# Altium PCB LTO 16S BMS.PcbDoc (part 2 of 2)
Units mm, origin at the board's own origin, x right, y up, seen from the top; angles counter-clockwise.
Board outline 100 x 100 mm, 4 copper layers (L1 - Primary, L2 - GND, L3 - GND, L4 - Secondary), stack 1.685 mm thick; 254 components, 145 nets, 666 pads, 230 vias.
Unrouted connection lines stored in the file: 137.
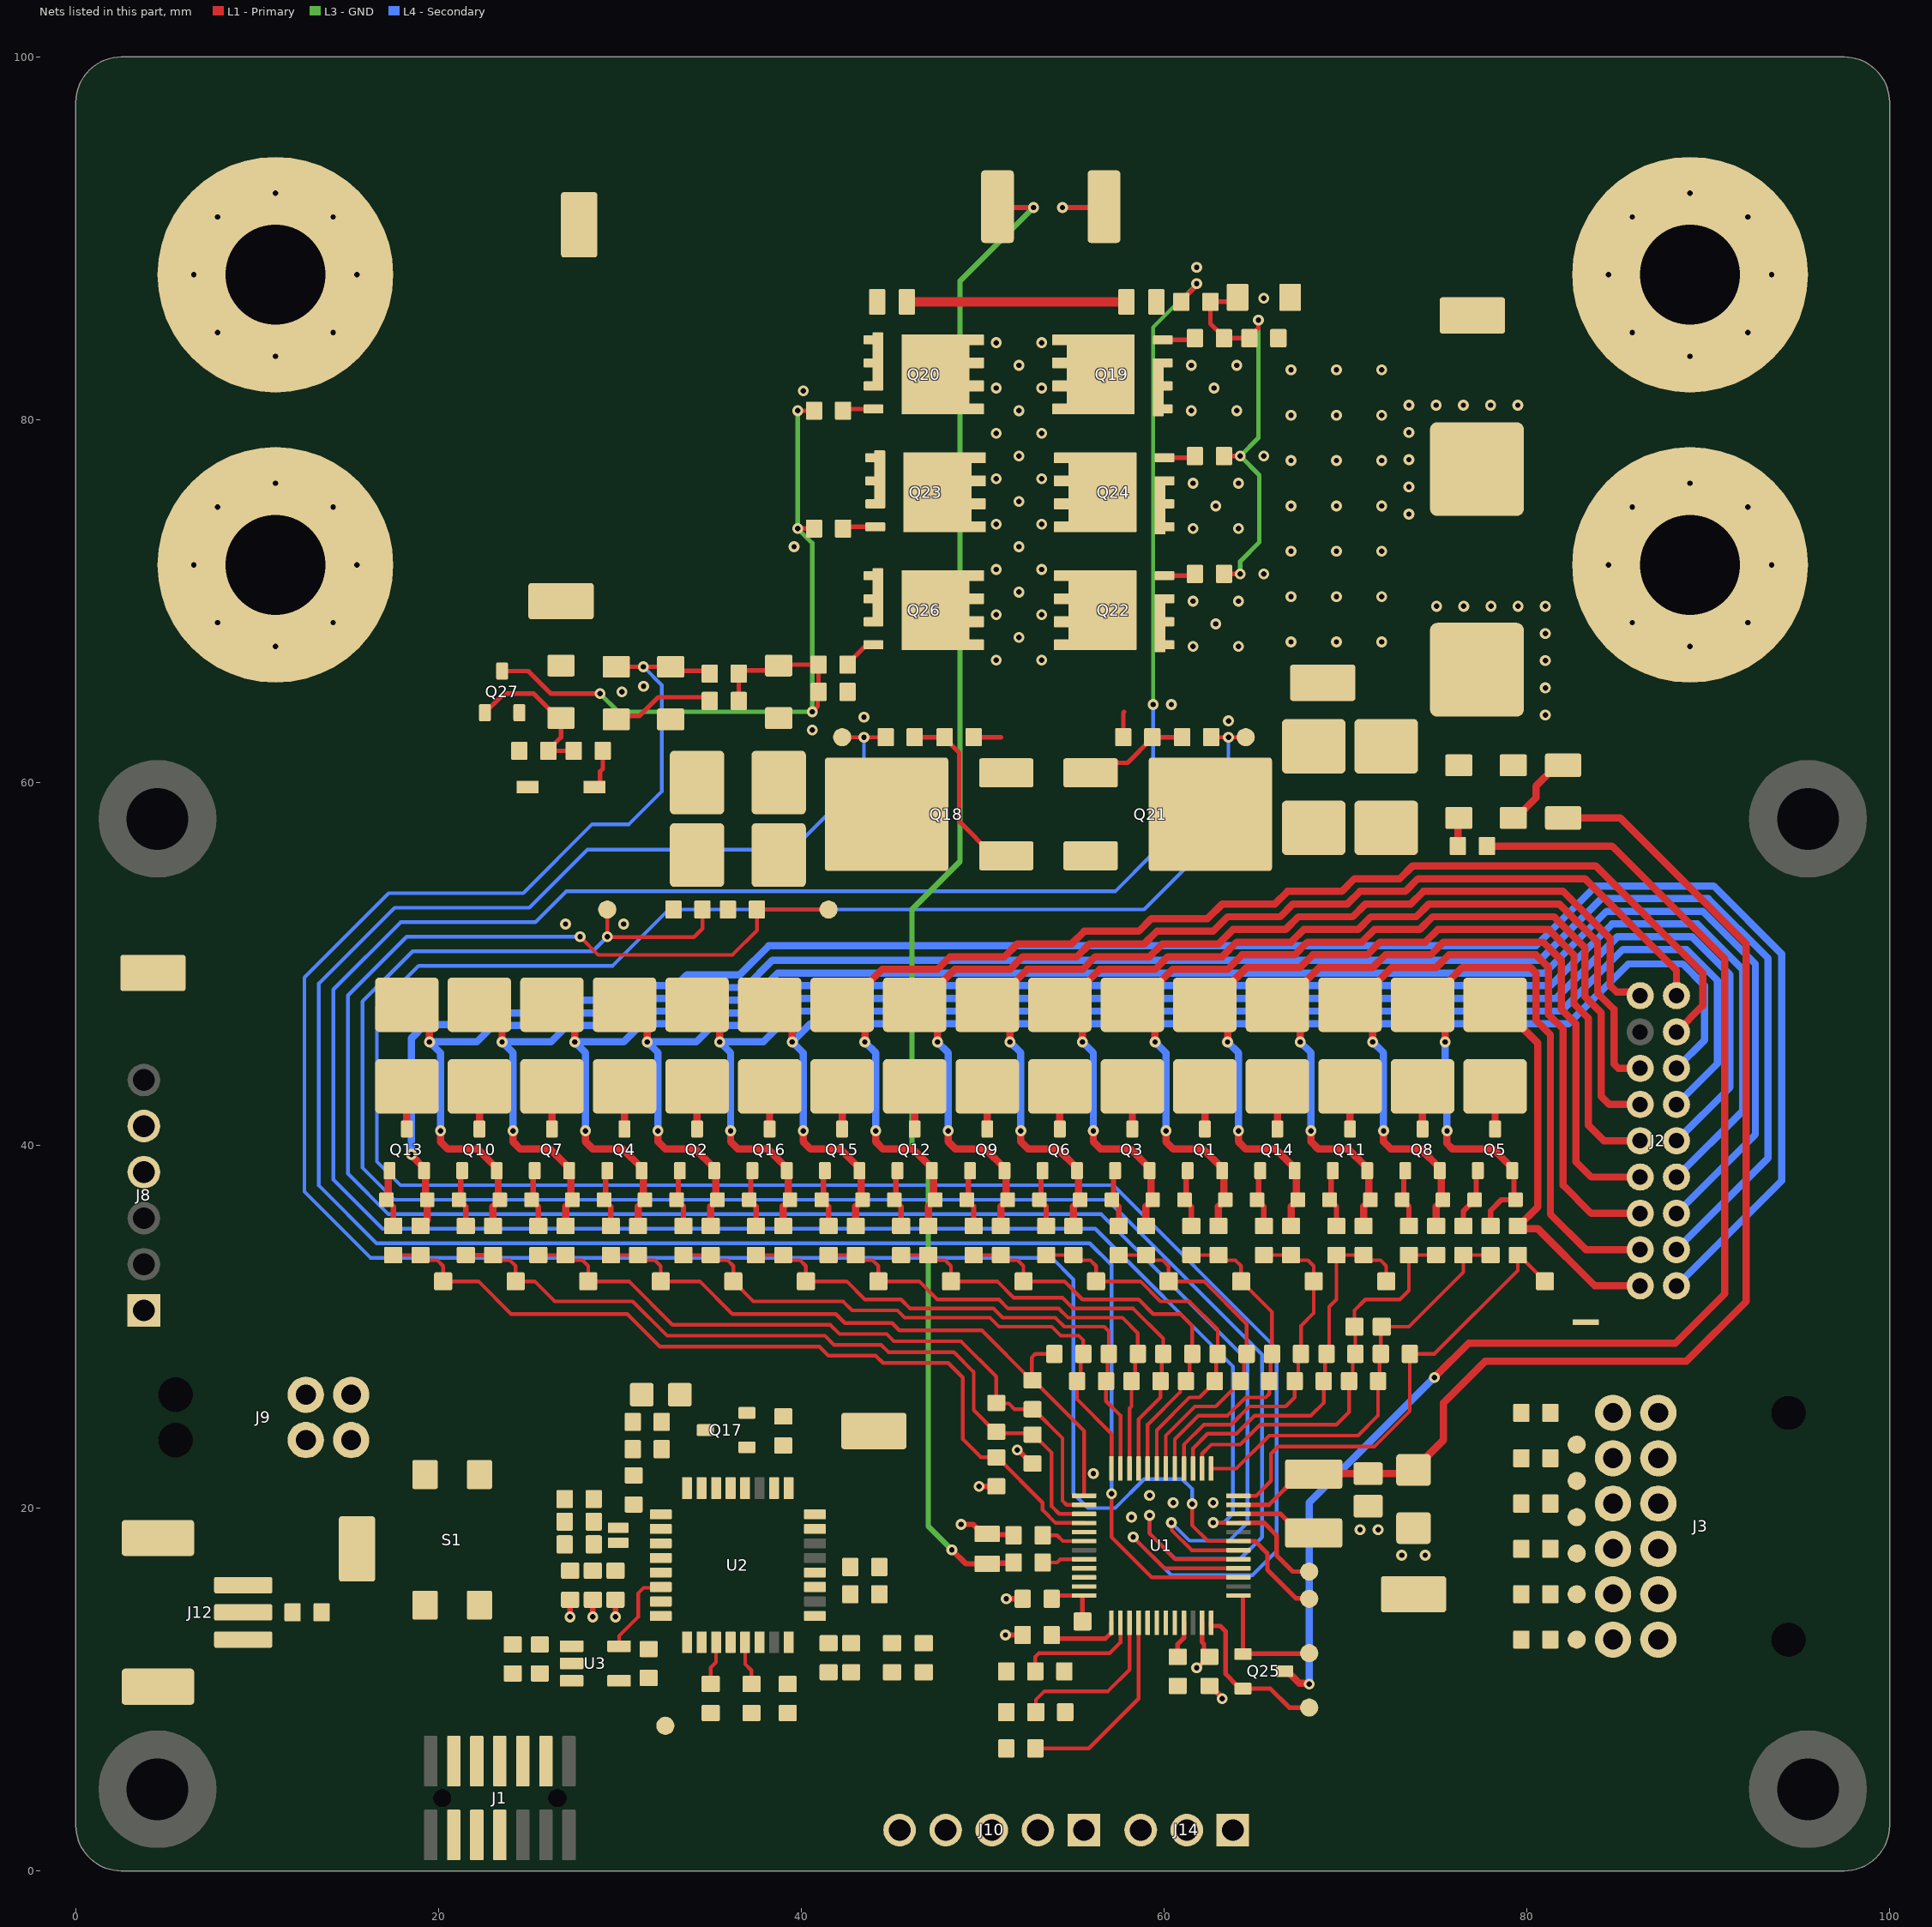
[diagram p4: the nets of this part, all layers, seen from the top]

## Part data (continued)
R68 R74 R76 R98 R101: "RES 10M OHM 1% 1/10W 0603", Manufacturer 1=YAGEO, Manufacturer Part Number 1=RC0603FR-0710ML, Supplier Part Number 1=311-10.0MHRCT-ND, Supplier 1=Digi-Key
R69 R75 R92 R93: "RES 5.1K OHM 1% 1/10W 0603", Manufacturer 1=YAGEO, Manufacturer Part Number 1=RC0603FR-135K1L, Package=0603, Supplier Part Number 1=13-RC0603FR-135K1LCT-ND, Mounting Type=SMD, Supplier 1=Digi-Key
R80 R89 R94 R95 R96 R97: "RES 51 OHM 1% 1/10W 0603", Manufacturer 1=YAGEO, Manufacturer Part Number 1=RC0603FR-0751RL, Supplier Part Number 1=311-51.0HRCT-ND, Supplier 1=Digi-Key
S1: "SWITCH TACTILE SPST-NO 50MA 12V", Manufacturer 1=E-Switch, Manufacturer Part Number 1=TL3305AF260QG, Supplier Part Number 1=EG5353CT-ND, Mounting Type=SMD, Supplier 1=Digi-Key
TP1 TP2 TP3 TP56 TP57 TP58 TP61 TP63: "TESTPOINT SMD LOOP", Manufacturer 1=Harwin, Manufacturer Part Number 1=S1751-46R, Package/Footprint=SMD, Supplier Part Number 1=952-1478-1-ND, Mounting Type=SMD, Supplier 1=Digi-Key
TP5 TP7 TP9 TP11 TP13 TP15 TP17 TP19 TP21 TP25 TP27 TP29 TP31 TP33 TP35 TP37 TP52 TP59: "TESTPOINT 1MM SQUARE"
TP22 TP23 TP39 TP40 TP41 TP44 TP45 TP46 TP47 TP48 TP53 TP54 TP55 TP60 TP62: "TESTPOINT 1MM CIRCLE"
U1: library part BQ7695204PFBR, "IC BAT LIFEPO4/LI-ION 3-16C TQFP", Manufacturer 1="Texas Instruments", Package/Footprint=48-TQFP, Supplier Part Number 1=296-BQ76952PFBRCT-ND, Manufacturer Part Number 1=BQ76952PFBR, Supplier 1=Digi-Key
U2: "IC MCU 32BIT 64KB FLASH 32LQFP", Manufacturer 1=STMicroelectronics, Package/Footprint=32-LQFP, Supplier Part Number 1=497-STM32L412K8T6-ND, Manufacturer Part Number 1=STM32L412K8T6, Supplier 1=Digi-Key
U3: library part IC_OSC_LTC6905, "IC OSC SILICON PROG TSOT23-5", Manufacturer 1="Analog Devices Inc.", Package/Footprint=SOT-23-5, Supplier Part Number 1=505-LTC6905CS5#TRMPBFCT-ND, Manufacturer Part Number 1=LTC6905CS5#TRMPBF, Supplier 1=Digi-Key
Y1: "CRYSTAL 32.7680KHZ 9PF SMD", Frequency=32.768kHz, Manufacturer 1="ECS Inc.", Manufacturer Part Number 1=ECS-.327-9-1210-TR, Supplier Part Number 1=XC2283CT-ND, Supplier 1=Digi-Key

## Via types
v1: diameter 0.6, hole 0.3, L1 - Primary to L4 - Secondary, tented both sides, 230 vias

## Nets (pads, with @x,y where several pads share a name; then routed paths per layer and width w, separated by ;. In a path a pad name is that pad's centre, name@x,y a point inside that pad or via, vN(x,y) a via of type N, cw(c..) or ccw(c..) an arc to the next point about the centre after c; other vN are vias at no path point)
1V8: C18.2 TP59.1 U1.24 | length 3.4
  L1 - Primary w0.254: C18.2@53.8,15 53.978,15.178 U1.24@55.593,15.178 55.502,15.178 55.5,15.176 TP59.1@55.5,13.75
3V3: C19.2 C22.2 C23.2 C24.2 C25.2 C26.2 C27.2 C28.2 J1.3 J12.1 R46.2 R47.2 R50.2 R52.1 R66.1 R77.1 R81.2 R82.2 R83.2 R84.2 R92.2 R93.2 TP3.1 U1.35 U2.1 U2.5 U2.17 U3.1 | length 3
  L1 - Primary w0.25: v1(61.8,11.2) 61.85,11.2 62.45,11.8 C19.2@62.5,11.8 62.2,12.1 62.2,12.5 62.093,12.607 U1.35@62.093,13.678
AFE_ALERT: R59.1 TP39.1 U1.25 U2.10 | length 4.1
  L1 - Primary w0.25: R59.1@53.8,13 54,12.8 56.765,12.8 57.093,13.128 U1.25@57.093,13.678
AFE_BAT: C20.2 C21.2 C29.1 R58.2 U1.47 | length 66.6
  L1 - Primary w0.25: U1.47@64.093,20.178 65.778,20.178 67.475,21.875 C29.1@68.25,21.875 C29.1@68.27,21.895 ; C21.2@71.25,21.895 C21.2@71.252,21.898 ; C20.2@73.548,21.898 C20.2@73.75,22.1
  L1 - Primary w0.4: C29.1@68.27,21.895 C21.2@71.25,21.895 ; C21.2@71.252,21.898 C20.2@73.548,21.898 ; C20.2@73.75,22.1 73.825,22.1 74.5,22.775 74.5,22.85 75.4,23.75 75.4,25.8 77.7,28.1 88.8,28.1 92.1,31.4 92.1,51.1 85.15,58.05 R58.2@82,58.05
AFE_CS_n: J10.4 R50.1 U1.29 U2.14
AFE_MISO/SDA: R57.1 R91.1 U1.27 | length 9.1
  L1 - Primary w0.203: R57.1@52.9,8.75 52.936,8.786 52.936,9.436 53.4,9.9 56.9,9.9 58.093,11.093 U1.27@58.093,13.678
AFE_MOSI: R87.1 U1.28 | length 11
  L1 - Primary w0.203: R87.1@52.9,6.75 55.85,6.75 58.593,9.493 U1.28@58.593,13.678
AFE_SCLK/SCL: R88.1 R90.1 U1.26 | length 6.9
  L1 - Primary w0.203: R88.1@52.9,11 52.9,11.8 53.1,12 57,12 57.593,12.593 U1.26@57.593,13.678
BOOT0: R78.2 U2.31
BREG: Q25.1 TP41.1 U1.37 | length 7.2
  L1 - Primary w0.25: U1.37@64.093,15.178 64.35,15.178 Q25.1@64.35,11.95 64.375,11.975 67.975,11.975 TP41.1@68,12
CELL_V0: D13.1 J2.17 NT1.2 Q13.2 R42.1 | length 112.2
  L1 - Primary w0.4: v1(18.5,39.5) 18.5,39.45 19.2,38.75 Q13.2@19.2,38.6 19.288,38.512 19.288,37.088 D13.1@19.375,37 19.375,35.875 19.05,35.55 R42.1@19,35.55
  L4 - Secondary w0.4: v1(18.5,39.5) 18.5,45.9 19.25,46.65 21.95,46.65 22.6,47.3 25.8,47.3 26.5,48 29.5,48 30.3,48.8 33.1,48.8 33.7,49.4 36.6,49.4 38.2,51 80.5,51 83.8,54.3 90.3,54.3 94.042,50.558 94.042,38.042 J2.17@88.25,32.25
CELL_V1: D10.1 J2.15 Q10.2 R33.1 R36.2 | length 112
  L1 - Primary w0.4: R36.2@18.25,47.75 19.5,46.5 v1(19.5,45.7) ; v1(20.1,40.8) 20.1,40.2 20.5,39.8 22.15,39.8 23.2,38.75 Q10.2@23.2,38.6 23.288,38.512 23.288,37.088 D10.1@23.375,37 23,36.625 R33.1@23,35.55
  L4 - Secondary w0.4: v1(20.1,40.8) 20.1,45.1 v1(19.5,45.7) 22.1,45.7 23,46.6 26.1,46.6 26.8,47.3 29.8,47.3 30.6,48.1 33.4,48.1 34,48.7 36.9,48.7 38.4,50.2 80.7,50.2 84.1,53.6 90,53.6 93.3,50.3 93.3,39.3 J2.15@88.25,34.25
CELL_V2: D7.1 J2.13 Q7.2 R24.1 R27.2 | length 104.3
  L1 - Primary w0.4: R27.2@22.25,47.75 23.5,46.5 v1(23.5,45.7) ; v1(24.1,40.8) 24.1,40.2 24.5,39.8 26.15,39.8 27.2,38.75 Q7.2@27.2,38.6 27.288,38.512 27.288,37.088 D7.1@27.375,37 27,36.625 R24.1@27,35.55
  L4 - Secondary w0.4: v1(24.1,40.8) 24.1,45.1 v1(23.5,45.7) 26.2,45.7 27.1,46.6 30.1,46.6 30.9,47.4 33.7,47.4 34.3,48 37.2,48 38.7,49.5 81,49.5 84.4,52.9 89.7,52.9 92.6,50 92.6,40.6 J2.13@88.25,36.25
CELL_V3: D4.1 J2.11 Q4.2 R15.1 R18.2 | length 96.5
  L1 - Primary w0.4: R18.2@26.25,47.75 27.5,46.5 v1(27.5,45.7) ; v1(28.1,40.8) 28.1,40.2 28.5,39.8 30.15,39.8 31.2,38.75 Q4.2@31.2,38.6 31.288,38.512 31.288,37.088 D4.1@31.375,37 31,36.625 R15.1@31,35.55
  L4 - Secondary w0.4: v1(28.1,40.8) 28.1,45.1 v1(27.5,45.7) 30.2,45.7 31.2,46.7 34,46.7 34.6,47.3 37.5,47.3 39,48.8 81.3,48.8 84.7,52.2 89.4,52.2 91.9,49.7 91.9,41.9 J2.11@88.25,38.25
CELL_V4: D2.1 J2.9 Q2.2 R8.1 R10.2 | length 88.8
  L1 - Primary w0.4: R10.2@30.25,47.75 31.5,46.5 v1(31.5,45.7) ; v1(32.1,40.8) 32.1,40.2 32.5,39.8 34.15,39.8 35.2,38.75 Q2.2@35.2,38.6 35.288,38.512 35.288,37.088 D2.1@35.375,37 35,36.625 R8.1@35,35.55
  L4 - Secondary w0.4: v1(32.1,40.8) 32.1,45.1 v1(31.5,45.7) 34.2,45.7 35.1,46.6 37.8,46.6 39.3,48.1 81.6,48.1 85,51.5 89.1,51.5 91.2,49.4 91.2,43.2 J2.9@88.25,40.25
CELL_V5: D16.1 J2.7 Q16.2 R2.1 R4.2 | length 81
  L1 - Primary w0.4: R4.2@34.25,47.75 35.5,46.5 v1(35.5,45.7) ; v1(36.1,40.8) 36.1,40.2 36.5,39.8 38.15,39.8 39.2,38.75 Q16.2@39.2,38.6 39.288,38.512 39.288,37.088 D16.1@39.375,37 39,36.625 R2.1@39,35.55
  L4 - Secondary w0.4: v1(36.1,40.8) 36.1,45.1 v1(35.5,45.7) 37.9,45.7 39.6,47.4 81.9,47.4 85.3,50.8 88.8,50.8 90.5,49.1 90.5,44.5 J2.7@88.25,42.25
CELL_V6: D15.1 J2.5 Q15.2 R49.1 R54.2 | length 73.5
  L1 - Primary w0.4: R54.2@38.5,47.75 R54.2@38.25,47.75 39.5,46.5 v1(39.5,45.7) ; v1(40.1,40.8) 40.1,40.2 40.5,39.8 42.15,39.8 43.2,38.75 Q15.2@43.2,38.6 43.288,38.512 43.288,37.088 D15.1@43.375,37 43,36.625 R49.1@43,35.55
  L4 - Secondary w0.4: v1(40.1,40.8) 40.1,45.1 v1(39.5,45.7) 40.5,46.7 82.3,46.7 85.6,50 88.6,50 89.8,48.8 89.8,45.8 J2.5@88.25,44.25
CELL_V7: D12.1 J2.3 Q12.2 R41.1 R44.2 | length 72.4
  L1 - Primary w0.4: v1(43.5,45.7) 43.5,46.5 42.375,47.625 R44.2@42.25,47.75 42.5,47.75 44.45,49.7 47.5,49.7 48.2,50.4 51.2,50.4 51.9,51.1 54.9,51.1 55.6,51.8 58.6,51.8 59.3,52.5 62.4,52.5 63.2,53.3 66.1,53.3 66.8,54 69.8,54 70.5,54.7 73,54.7 73.7,55.4 83.8,55.4 89.7,49.5 89.7,47.7 J2.3@88.25,46.25 ; v1(44.1,40.8) 44.1,40.2 44.5,39.8 46.15,39.8 47.2,38.75 Q12.2@47.2,38.6 47.288,38.512 47.288,37.088 D12.1@47.375,37 47,36.625 R41.1@47,35.55
  L4 - Secondary w0.4: v1(43.5,45.7) 44.1,45.1 v1(44.1,40.8)
CELL_V8: D9.1 J2.1 Q9.2 R32.1 R35.2 | length 63.8
  L1 - Primary w0.4: v1(47.5,45.7) 47.5,46.5 46.375,47.625 R35.2@46.25,47.75 46.5,47.75 48.45,49.7 51.5,49.7 52.2,50.4 55.2,50.4 55.9,51.1 58.9,51.1 59.6,51.8 62.7,51.8 63.5,52.6 66.4,52.6 67.1,53.3 70.1,53.3 70.8,54 73.3,54 74,54.7 83.2,54.7 88.25,49.65 J2.1@88.25,48.25 ; v1(48.1,40.8) 48.1,40.2 48.5,39.8 50.15,39.8 51.2,38.75 Q9.2@51.2,38.6 51.287,38.512 51.287,37.088 D9.1@51.375,37 51,36.625 R32.1@51,35.55
  L4 - Secondary w0.4: v1(47.5,45.7) 48.1,45.1 v1(48.1,40.8)
CELL_V9: D6.1 J2.2 Q6.2 R23.1 R26.2 | length 57.9
  L1 - Primary w0.4: v1(51.5,45.7) 51.5,46.5 50.375,47.625 R26.2@50.25,47.75 50.5,47.75 52.45,49.7 55.5,49.7 56.2,50.4 59.2,50.4 59.9,51.1 63,51.1 63.8,51.9 66.7,51.9 67.4,52.6 70.4,52.6 71.1,53.3 73.6,53.3 74.3,54 82,54 84.6,51.4 84.6,48.8 84.94,48.46 86.04,48.46 J2.2@86.25,48.25 ; v1(52.1,40.8) 52.1,40.2 52.5,39.8 54.15,39.8 55.2,38.75 Q6.2@55.2,38.6 55.287,38.512 55.287,37.088 D6.1@55.375,37 55,36.625 R23.1@55,35.55
  L4 - Secondary w0.4: v1(51.5,45.7) 52.1,45.1 v1(52.1,40.8)
CELL_V10: D3.1 J2.6 Q3.2 R14.1 R17.2 | length 56.9
  L1 - Primary w0.4: v1(55.5,45.7) 55.5,46.5 54.375,47.625 R17.2@54.25,47.75 54.5,47.75 56.45,49.7 59.5,49.7 60.2,50.4 63.2,50.4 64,51.2 67,51.2 67.7,51.9 70.7,51.9 71.4,52.6 73.9,52.6 74.6,53.3 81.8,53.3 83.9,51.2 83.9,48.4 84.8,47.5 84.8,44.484 85.034,44.25 J2.6@86.25,44.25 ; v1(56.1,40.8) 56.1,40.2 56.5,39.8 58.15,39.8 59.2,38.75 Q3.2@59.2,38.6 59.287,38.512 59.287,37.088 D3.1@59.375,37 59,36.625 R14.1@59,35.55
  L4 - Secondary w0.4: v1(55.5,45.7) 56.1,45.1 v1(56.1,40.8)
CELL_V11: D1.1 J2.8 Q1.2 R7.1 R9.2 | length 54
  L1 - Primary w0.4: v1(59.5,45.7) 59.5,46.5 58.375,47.625 R9.2@58.25,47.75 58.5,47.75 60.45,49.7 63.5,49.7 64.3,50.5 67.2,50.5 67.9,51.2 70.9,51.2 71.6,51.9 74.1,51.9 74.8,52.6 81.5,52.6 83.2,50.9 83.2,48.2 84.1,47.3 84.1,42.7 84.55,42.25 J2.8@86.25,42.25 ; v1(60.1,40.8) 60.1,40.2 60.5,39.8 62.15,39.8 63.2,38.75 Q1.2@63.2,38.6 63.287,38.512 63.287,37.088 D1.1@63.375,37 63,36.625 R7.1@63,35.55
  L4 - Secondary w0.4: v1(59.5,45.7) 60.1,45.1 v1(60.1,40.8)
CELL_V12: D14.1 J2.10 Q14.2 R1.1 R3.2 | length 51
  L1 - Primary w0.4: v1(63.5,45.7) 63.5,46.5 62.375,47.625 R3.2@62.25,47.75 62.5,47.75 64.55,49.8 67.5,49.8 68.2,50.5 71.2,50.5 71.9,51.2 74.4,51.2 75.1,51.9 81.2,51.9 82.6,50.5 82.6,47.8 83.4,47 83.4,41.1 84.25,40.25 J2.10@86.25,40.25 ; v1(64.1,40.8) 64.1,40.2 64.5,39.8 66.15,39.8 67.2,38.75 Q14.2@67.2,38.6 67.287,38.512 67.287,37.088 D14.1@67.375,37 67,36.625 R1.1@67,35.55
  L4 - Secondary w0.4: v1(63.5,45.7) 64.1,45.1 v1(64.1,40.8)
CELL_V13: D11.1 J2.12 Q11.2 R40.1 R43.2 | length 48.3
  L1 - Primary w0.4: v1(67.5,45.7) 67.5,46.5 66.375,47.625 R43.2@66.25,47.75 66.5,47.75 68.55,49.8 71.5,49.8 72.2,50.5 74.7,50.5 75.4,51.2 80.9,51.2 81.9,50.2 81.9,47.5 82.7,46.7 82.7,39.1 83.55,38.25 J2.12@86.25,38.25 ; v1(68.1,40.8) 68.1,40.2 68.5,39.8 70.15,39.8 71.2,38.75 Q11.2@71.2,38.6 71.287,38.512 71.287,37.088 D11.1@71.375,37 71,36.625 R40.1@71,35.55
  L4 - Secondary w0.4: v1(67.5,45.7) 68.1,45.1 v1(68.1,40.8)
CELL_V14: D8.1 J2.14 Q8.2 R31.1 R34.2 | length 45
  L1 - Primary w0.4: v1(71.5,45.7) 71.5,46.5 70.375,47.625 R34.2@70.25,47.75 70.5,47.75 72.55,49.8 75,49.8 75.7,50.5 80.5,50.5 81.2,49.8 81.2,47.2 82,46.4 82,37.8 83.55,36.25 J2.14@86.25,36.25 ; v1(72.1,40.8) 72.1,40.2 72.5,39.8 74.15,39.8 75.2,38.75 Q8.2@75.2,38.6 75.287,38.512 75.287,37.088 D8.1@75.375,37 75,36.625 R31.1@75,35.55
  L4 - Secondary w0.4: v1(71.5,45.7) 72.1,45.1 v1(72.1,40.8)
CELL_V15: D5.1 J2.16 Q5.2 R22.1 R25.2 | length 43.2
  L1 - Primary w0.3: R22.1@78,35.55 78,36.4 78.6,37 D5.1@79.375,37 79.287,37.088 79.287,38.512 Q5.2@79.2,38.6
  L1 - Primary w0.4: R25.2@74.25,47.75 74.486,47.75 75.785,49.048 75.785,49.149 76.435,49.8 80.2,49.8 80.5,49.5 80.5,46.9 81.3,46.1 81.3,36.2 83.25,34.25 J2.16@86.25,34.25 ; R25.2@74.368,47.632 75.5,46.5 v1(75.5,45.7) ; v1(75.6,40.8) 75.6,40.1 75.9,39.8 78.15,39.8 79.2,38.75 Q5.2@79.2,38.6
  L4 - Secondary w0.4: v1(75.5,45.7) 75.5,43.271 75.6,43.171 v1(75.6,40.8)
CELL_V16: J2.18 R13.1 R16.2 | length 21.9
  L1 - Primary w0.4: R16.2@78.25,47.75 78.486,47.75 80.6,45.636 80.6,36.6 79.55,35.55 R13.1@79.5,35.55 79.65,35.4 80.6,35.4 83.75,32.25 J2.18@86.25,32.25
CGATE: D19.2 R76.1 R80.1 R89.1 R94.1 R99.2 | length 23.6
  L1 - Primary w0.25: R89.1@63.3,71.5 v1(64.2,71.5) ; R94.1@63.3,78 v1(64.2,78) ; D19.2@64.05,86.75 63.811,86.511 62.561,86.511 R99.2@62.55,86.5 62.55,85.3 63.3,84.55 R80.1@63.3,84.5 R76.1@64.7,84.5 64.7,84.55 65.2,85.05 v1(65.2,85.5)
  L3 - GND w0.25: v1(64.2,71.5) 64.2,72.2 65.25,73.25 65.25,76.95 v1(64.2,78) 65.2,79 v1(65.2,85.5)
CHG: R99.1 TP62.1 U1.45 | length 162.9
  L1 - Primary w0.203: v1(62.7,19.2) 62.711,19.189 64.083,19.189 U1.45@64.093,19.178
  L1 - Primary w0.254: R99.1@60.95,86.5 60.95,86.55 61.734,87.334 61.734,87.434 v1(61.8,87.5) ; U1.45@64.093,19.178 65.522,19.178 66.2,18.5 66.2,17.4 67.1,16.5 TP62.1@68,16.5
  L3 - GND w0.203: v1(59.4,64.3) 59.4,85.1 v1(61.8,87.5)
  L4 - Secondary w0.203: v1(59.4,64.3) 59.4,56.1 57.3,54 27.031,54 25.331,52.3 17.906,52.3 14.2,48.594 14.2,38.106 16.906,35.4 56.206,35.4 63.8,27.806 63.8,19.7 63.3,19.2 v1(62.7,19.2)
CP1: C29.2 U1.46 | length 4.6
  L1 - Primary w0.25: U1.46@64.093,19.678 66.422,19.678 67.475,18.625 C29.2@68.25,18.625
DEEPSLEEP_EN: R67.1 U2.8
DFETOFF: U1.30 U2.9
DGATE: D20.2 Q27.3 R95.1 R96.1 R97.1 R98.1 R100.2 R102.2 | length 45.6
  L1 - Primary w0.25: Q27.3@23.5,66.15 24.95,66.15 26.2,64.9 v1(28.9,64.9) ; R100.2@36.55,64.5 R102.2@36.55,66 36.736,66.186 38.486,66.186 D20.2@38.75,66.45 38.8,66.5 R95.1@40.95,66.5 R98.1@40.95,65 40.9,64.95 40.9,64.208 40.6,63.908 v1(40.6,63.9) ; v1(39.8,74) R96.1@40.7,74 ; v1(39.8,80.5) R97.1@40.7,80.5
  L3 - GND w0.25: v1(28.9,64.9) 29.9,63.9 v1(40.6,63.9) 40.6,73.2 v1(39.8,74) v1(39.8,80.5)
DIV: R51.2 U3.4
DSG: D21.2 D23.2 R102.1 TP55.1 U1.43 | length 123
  L1 - Primary w0.203: v1(61.542,20.233) 61.542,19.058 62.422,18.178 U1.43@64.093,18.178
  L1 - Primary w0.25: D21.2@29.794,66.38 v1(31.294,66.38) D23.2@32.794,66.38 33.023,66.151 34.799,66.151 R102.1@34.95,66 ; U1.43@64.093,18.178 65.022,18.178 65.7,17.5 65.7,16.6 67.281,15.019 67.981,15.019 TP55.1@68,15
  L4 - Secondary w0.203: v1(31.294,66.38) 32.3,65.374 32.3,59.5 30.5,57.7 28.469,57.7 24.669,53.9 17.243,53.9 12.6,49.257 12.6,37.443 16.243,33.8 53.8,33.8 55,32.6 55,20.8 55.8,20 57.3,20 58.9,21.6 61,21.6 61.542,21.058 v1(61.542,20.233)
HFCK_IN: U2.6 U3.5 | length 4.7
  L1 - Primary w0.203: U3.5@29.953,12.383 29.953,12.953 31,14 31,15.3 31.3,15.6 32.2,15.6 U2.6@32.249,15.65
I2C_SCL: J14.1 R85.1 R90.2 R93.1
I2C_SDA: J14.2 R86.1 R91.2 R92.1
JTCK/SWCLK: J1.6 U2.24
JTDI: J1.10 U2.25
JTDO: J1.8 U2.26
JTMS/SWDIO: J1.4 U2.23
LD: R71.1 TP44.1 U1.41 | length 110.8
  L1 - Primary w0.203: TP44.1@29.3,53 v1(29.3,51.5) 29.324,51.476 34.076,51.476 34.55,51.95 R71.1@34.55,53 ; v1(59.2,19.6) 59.2,18.6 60.622,17.178 U1.41@64.093,17.178
  L4 - Secondary w0.203: v1(29.3,51.5) 28.5,50.7 18.569,50.7 15.8,47.931 15.8,38.769 17.569,37 56.869,37 65.4,28.469 65.4,18.4 64.2,17.2 60.6,17.2 59.2,18.6 v1(59.2,19.6)
NetC33_2: C33.2 C34.1 | length 12.1
  L1 - Primary w0.5: C34.1@45.825,86.5 C33.2@57.925,86.5
NetD1_2: D1.2 Q1.1 R5.1 | length 3.3
  L1 - Primary w0.3: Q1.1@61.3,38.6 61.212,38.513 61.212,37.087 D1.2@61.125,37 61.5,36.625 R5.1@61.5,35.55
NetD2_2: D2.2 Q2.1 R6.1 | length 3.3
  L1 - Primary w0.3: Q2.1@33.3,38.6 33.213,38.513 33.213,37.087 D2.2@33.125,37 33.5,36.625 R6.1@33.5,35.55
NetD3_2: D3.2 Q3.1 R11.1 | length 3.3
  L1 - Primary w0.3: Q3.1@57.3,38.6 57.212,38.513 57.212,37.087 D3.2@57.125,37 57.5,36.625 R11.1@57.5,35.55
NetD4_2: D4.2 Q4.1 R12.1 | length 3.3
  L1 - Primary w0.3: Q4.1@29.3,38.6 29.213,38.513 29.213,37.087 D4.2@29.125,37 29.5,36.625 R12.1@29.5,35.55
NetD5_2: D5.2 Q5.1 R19.1 | length 3.4
  L1 - Primary w0.3: R19.1@76.5,35.55 76.5,36.375 D5.2@77.125,37 77.212,37.087 77.212,38.513 Q5.1@77.3,38.6
NetD6_2: D6.2 Q6.1 R20.1 | length 3.3
  L1 - Primary w0.3: Q6.1@53.3,38.6 53.212,38.513 53.212,37.087 D6.2@53.125,37 53.5,36.625 R20.1@53.5,35.55
NetD7_2: D7.2 Q7.1 R21.1 | length 3.3
  L1 - Primary w0.3: Q7.1@25.3,38.6 25.213,38.513 25.213,37.087 D7.2@25.125,37 25.5,36.625 R21.1@25.5,35.55
NetD8_2: D8.2 Q8.1 R28.1 | length 3.3
  L1 - Primary w0.3: Q8.1@73.3,38.6 73.212,38.513 73.212,37.087 D8.2@73.125,37 73.5,36.625 R28.1@73.5,35.55
NetD9_2: D9.2 Q9.1 R29.1 | length 3.3
  L1 - Primary w0.3: Q9.1@49.3,38.6 49.212,38.513 49.212,37.087 D9.2@49.125,37 49.5,36.625 R29.1@49.5,35.55
NetD10_2: D10.2 Q10.1 R30.1 | length 3.3
  L1 - Primary w0.3: Q10.1@21.3,38.6 21.213,38.513 21.213,37.087 D10.2@21.125,37 21.5,36.625 R30.1@21.5,35.55
NetD11_2: D11.2 Q11.1 R37.1 | length 3.3
  L1 - Primary w0.3: Q11.1@69.3,38.6 69.212,38.513 69.212,37.087 D11.2@69.125,37 69.5,36.625 R37.1@69.5,35.55
NetD12_2: D12.2 Q12.1 R38.1 | length 3.3
  L1 - Primary w0.3: Q12.1@45.3,38.6 45.213,38.513 45.213,37.087 D12.2@45.125,37 45.5,36.625 R38.1@45.5,35.55
NetD13_2: D13.2 Q13.1 R39.1 | length 5
  L1 - Primary w0.3: Q13.1@17.3,38.6 17.213,38.513 17.213,37.087 D13.2@17.125,37 17.5,36.625 R39.1@17.5,35.55
  L1 - Primary w0.4: D13.2@17.125,37 17.213,37.087 17.213,38.513 Q13.1@17.3,38.6
NetD14_2: D14.2 Q14.1 R45.1 | length 3.3
  L1 - Primary w0.3: Q14.1@65.3,38.6 65.212,38.513 65.212,37.087 D14.2@65.125,37 65.5,36.625 R45.1@65.5,35.55
NetD15_2: D15.2 Q15.1 R48.1 | length 3.3
  L1 - Primary w0.3: Q15.1@41.3,38.6 41.213,38.513 41.213,37.087 D15.2@41.125,37 41.5,36.625 R48.1@41.5,35.55
NetD16_2: D16.2 Q16.1 R55.1 | length 3.3
  L1 - Primary w0.3: Q16.1@37.3,38.6 37.213,38.513 37.213,37.087 D16.2@37.125,37 37.5,36.625 R55.1@37.5,35.55
NetD17_2: D17.2 R53.2 | length 1.6
  L1 - Primary w0.4: R53.2@76.2,56.5 76.2,58 D17.2@76.25,58.05
NetD18_2: D18.2 R58.1 | length 4.3
  L1 - Primary w0.4: D18.2@79.25,58.05 79.4,58.05 80.5,59.15 80.5,59.8 81.65,60.95 R58.1@82,60.95
NetD21_1: D21.1 R100.1 | length 5.7
  L1 - Primary w0.25: D21.1@29.794,63.48 29.987,63.673 31.073,63.673 32.1,64.7 34.75,64.7 R100.1@34.95,64.5
NetD22_2: D22.2 R103.1 | length 2.2
  L1 - Primary w0.25: D22.2@28.6,59.75 28.675,59.75 28.9,59.975 28.9,60.6 29.05,60.75 R103.1@29.05,61.75
NetD24_2: D24.2 Q27.1 R101.1 R103.2 | length 8.8
  L1 - Primary w0.25: Q27.1@22.55,63.85 22.55,64 22.75,64.2 22.9,64.2 23.6,64.9 25.25,64.9 26.6,63.55 D24.2@26.75,63.55 26.75,62.5 26.05,61.8 R101.1@26.05,61.75 R103.2@27.45,61.75
NetJ12_2: J12.2 R67.2
NetLED1_1: LED1.1 R52.2
NetLED1_2: LED1.2 Q17.3
NetQ1_3: Q1.3 R3.1 | length 2.4
  L1 - Primary w0.4: Q1.3@62.25,40.9 R3.1@62.25,43.25
NetQ2_3: Q2.3 R4.1 | length 2.4
  L1 - Primary w0.4: Q2.3@34.25,40.9 R4.1@34.25,43.25
NetQ3_3: Q3.3 R9.1 | length 2.4
  L1 - Primary w0.4: Q3.3@58.25,40.9 R9.1@58.25,43.25
NetQ4_3: Q4.3 R10.1 | length 2.4
  L1 - Primary w0.4: Q4.3@30.25,40.9 R10.1@30.25,43.25
NetQ5_3: Q5.3 R16.1 | length 2.4
  L1 - Primary w0.4: Q5.3@78.25,40.9 R16.1@78.25,43.25
NetQ6_3: Q6.3 R17.1 | length 2.4
  L1 - Primary w0.4: Q6.3@54.25,40.9 R17.1@54.25,43.25
NetQ7_3: Q7.3 R18.1 | length 2.4
  L1 - Primary w0.4: Q7.3@26.25,40.9 R18.1@26.25,43.25
NetQ8_3: Q8.3 R25.1 | length 2.4
  L1 - Primary w0.4: Q8.3@74.25,40.9 R25.1@74.25,43.25
NetQ9_3: Q9.3 R26.1 | length 2.4
  L1 - Primary w0.4: Q9.3@50.25,40.9 R26.1@50.25,43.25
NetQ10_3: Q10.3 R27.1 | length 2.4
  L1 - Primary w0.4: Q10.3@22.25,40.9 R27.1@22.25,43.25
NetQ11_3: Q11.3 R34.1 | length 2.4
  L1 - Primary w0.4: Q11.3@70.25,40.9 R34.1@70.25,43.25
NetQ12_3: Q12.3 R35.1 | length 2.4
  L1 - Primary w0.4: Q12.3@46.25,40.9 R35.1@46.25,43.25
NetQ13_3: Q13.3 R36.1 | length 2.4
  L1 - Primary w0.4: Q13.3@18.25,40.9 R36.1@18.25,43.25
NetQ14_3: Q14.3 R43.1 | length 2.4
  L1 - Primary w0.4: Q14.3@66.25,40.9 R43.1@66.25,43.25
NetQ15_3: Q15.3 R44.1 | length 2.4
  L1 - Primary w0.4: Q15.3@42.25,40.9 R44.1@42.25,43.25
NetQ16_3: Q16.3 R54.1 | length 2.4
  L1 - Primary w0.4: Q16.3@38.25,40.9 R54.1@38.25,43.25
NetQ18_1: Q18.1 R68.2 R69.2 | length 10
  L1 - Primary w0.25: R69.2@46.25,62.5 R68.2@47.9,62.5 47.9,62.45 48.7,61.65 48.7,57.864 50.6,55.964 Q18.1@51.3,55.964
NetQ19_4: Q19.4 R80.2 | length 1.8
  L1 - Primary w0.25: Q19.4@59.925,84.405 61.605,84.405 R80.2@61.7,84.5
NetQ20_4: Q20.4 R97.2 | length 1.7
  L1 - Primary w0.25: R97.2@42.3,80.5 42.395,80.595 Q20.4@43.975,80.595
NetQ21_1: Q21.1 R74.1 R75.2 | length 5.9
  L1 - Primary w0.25: Q21.1@55.95,60.536 56.505,61.091 57.991,61.091 59.35,62.45 R74.1@59.35,62.5 R75.2@61,62.5
NetQ22_4: Q22.4 R89.2 | length 1.7
  L1 - Primary w0.25: Q22.4@60.025,71.405 61.605,71.405 R89.2@61.7,71.5
NetQ23_4: Q23.4 R96.2 | length 1.8
  L1 - Primary w0.25: R96.2@42.3,74 42.395,74.095 Q23.4@44.075,74.095
NetQ24_4: Q24.4 R94.2 | length 1.7
  L1 - Primary w0.25: Q24.4@60.025,77.905 61.605,77.905 R94.2@61.7,78
NetQ25_3: Q25.3 R53.1 | length 73.5
  L1 - Primary w0.4: Q25.3@66.65,11 66.8,11 67.462,10.338 67.962,10.338 v1(68,10.3) ; v1(74.9,27.2) 76.8,29.1 88.2,29.1 90.9,31.8 90.9,50.3 84.7,56.5 R53.1@77.8,56.5
  L4 - Secondary w0.4: v1(68,10.3) 68,20.3 v1(74.9,27.2)
NetQ26_4: Q26.4 R95.2 | length 1.9
  L1 - Primary w0.25: R95.2@42.55,66.5 42.55,66.55 43.47,67.47 43.85,67.47 Q26.4@43.975,67.595
NetR64_2: R64.2 U2.11 | length 2.4
  L1 - Primary w0.203: R64.2@35,10.3 35,11.2 35.299,11.499 U2.11@35.299,12.6
NetR65_2: R65.2 U2.13 | length 2.4
  L1 - Primary w0.203: U2.13@36.899,12.6 36.899,11.401 37.25,11.05 R65.2@37.25,10.3
NetR79_2: R79.2 U1.33 | length 2
  L1 - Primary w0.254: R79.2@60.75,11.8 60.75,12.5 61.093,12.843 U1.33@61.093,13.678
NetR85_2: R85.2 U2.19
NetR86_2: R86.2 U2.20
NRST: J1.12 R77.2 S1.1 S1.2 U2.4
OSC32-IN: C30.2 U2.2 Y1.1
OSC32-OUT: C31.2 U2.3 Y1.2
PACK: R70.1 TP60.1 U1.42 | length 112.2
  L1 - Primary w0.203: v1(27.8,51.5) 28.8,50.5 36.2,50.5 37.55,51.85 R70.1@37.55,53 TP60.1@41.5,53 ; v1(60.4,19.2) 60.424,19.176 60.424,18.776 61.522,17.678 U1.42@64.093,17.678
  L4 - Secondary w0.203: v1(27.8,51.5) 18.237,51.5 15,48.263 15,38.437 17.237,36.2 56.537,36.2 64.6,28.137 64.6,19.2 63.6,18.2 61.4,18.2 v1(60.4,19.2)
PCHG: R75.1 TP54.1 U1.40 | length 147.2
  L1 - Primary w0.203: v1(58.3,18.4) 60.022,16.678 U1.40@64.093,16.678 ; R75.1@62.6,62.5 v1(63.55,62.5) TP54.1@64.5,62.5
  L4 - Secondary w0.203: v1(58.3,18.4) 60.4,16.3 64.875,16.3 66.2,17.625 66.2,28.8 57.2,37.8 17.9,37.8 16.6,39.1 16.6,47.6 18.9,49.9 29.6,49.9 32.7,53 58.9,53 63.55,57.65 v1(63.55,62.5)
PDSG: R69.1 TP53.1 U1.39 | length 119
  L1 - Primary w0.203: TP53.1@42.25,62.5 v1(43.45,62.5) R69.1@44.65,62.5 ; v1(57.1,20.8) 57.1,18.4 59.322,16.178 U1.39@64.093,16.178
  L4 - Secondary w0.203: v1(43.45,62.5) 43.45,60.25 39.5,56.3 28.2,56.3 25,53.1 17.575,53.1 13.4,48.925 13.4,37.775 16.575,34.6 55.9,34.6 57.1,33.4 v1(57.1,20.8)
REGIN: Q25.2 TP40.1 U1.36 | length 8.8
  L1 - Primary w0.254: U1.36@62.593,13.678 62.593,13.502 62.595,13.5 63.1,13.5 63.4,13.2 63.4,10.85 64.002,10.248 64.2,10.05 Q25.2@64.35,10.05 65.85,10.05 66.9,9 TP40.1@68,9
SET: R66.2 U3.3
SPI_MISO: J10.2 R57.2 U2.12
SPI_MOSI: J10.1 R65.1 R87.2
SPI_SCLK: J10.3 R64.1 R88.2
SRN: R62.2 U1.20 | length 2.4
  L1 - Primary w0.203: R62.2@53.3,17 54.1,17 54.278,17.178 U1.20@55.593,17.178
SRP: R61.2 U1.18 | length 2.4
  L1 - Primary w0.203: R61.2@53.3,18.5 54.1,18.5 54.422,18.178 U1.18@55.593,18.178
STM32_HEARTBEAT: Q17.1 R104.2 U2.28
T1: J3.1 R81.1 TP45.1 U1.21
T2: J3.2 R82.1 TP46.1 U1.22
T3: J3.3 R83.1 TP47.1 U1.23
T4: J3.4 R46.1 TP22.1 U1.31
T5: J3.5 R47.1 TP23.1 U1.32
T6: J3.6 R84.1 TP48.1 U2.7
USART_RX: J8.4 J9.2 U2.30
USART_TX: J8.5 J9.1 U2.29
V_CHG_DSG: Q18.3 Q19.5 Q19.6 Q19.7 Q19.8 Q20.5 Q20.6 Q20.7 Q20.8 Q21.3 Q22.5 Q22.6 Q22.7 Q22.8 Q23.5 Q23.6 Q23.7 Q23.8 Q24.5 Q24.6 Q24.7 Q24.8 Q26.5 Q26.6 Q26.7 Q26.8 R68.1 R74.2 | length 2.9
  L1 - Primary w0.25: R68.1@49.5,62.5 51,62.5 ; R74.2@57.75,62.5 57.75,63.85 57.8,63.9
  other v1: 50.75,66.75 53.25,66.75 52,68 50.75,69.25 53.25,69.25 52,70.5 50.75,71.75 53.25,71.75 52,73 50.75,74.25 53.25,74.25 52,75.5 50.75,76.75 53.25,76.75 52,78 50.75,79.25 53.25,79.25 52,80.5 50.75,81.75 53.25,81.75 52,83 50.75,84.25 53.25,84.25
VBAT+: C33.1 D17.1 D18.1 D19.1 F1.2 Q19.1 Q19.2 Q19.3 Q22.1 Q22.2 Q22.3 Q24.1 Q24.2 Q24.3 R72.1 R73.1 R76.2 TP2.1
  other v1: 61.6,67.5 64.1,67.5 67,67.75 69.5,67.75 72,67.75 62.85,68.75 61.6,70 64.1,70 67,70.25 69.5,70.25 72,70.25 67,72.75 69.5,72.75 72,72.75 61.6,74 64.1,74 73.5,74.8 62.85,75.25 67,75.25 69.5,75.25 72,75.25 73.5,76.3 61.6,76.5 64.1,76.5 67,77.75 69.5,77.75 72,77.75 73.5,77.8 73.5,79.3 67,80.25 69.5,80.25 72,80.25 61.5,80.5 64,80.5 73.5,80.8 75,80.8 76.5,80.8 78,80.8 79.5,80.8 62.75,81.75 67,82.75 69.5,82.75 72,82.75 61.5,83 64,83
VBAT+_F: F1.1 MH5.0
  other v1: 81.02,63.72 81.02,65.22 81.02,66.72 89,67.5 81.02,68.22 85.818,68.818 92.182,68.818 75.02,69.72 76.52,69.72 78.02,69.72 79.52,69.72 81.02,69.72 84.5,72 93.5,72 85.818,75.182 92.182,75.182 89,76.5
VBAT-: C13.1 C16.1 C18.1 C19.1 C20.1 C21.1 C22.1 C23.1 C24.1 C25.1 C26.1 C27.1 C28.1 C30.1 C31.1 C32.1 D22.1 D23.1 J1.5 J1.7 J3.7 J3.8 J3.9 J3.10 J3.11 J3.12 J8.1 J10.5 J12.0 J12.3 J14.3 MH6.0 NT1.1 Q17.2 R51.1 R59.2 R61.1 R63.1 R78.1 R79.1 R104.1 S1.3 S1.4 TP1.1 TP56.1 TP57.1 TP58.1 U1.17 U2.16 U2.32 U3.2 | length 13.3
  L1 - Primary w0.3: v1(27.25,14) C25.1@27.25,14.95 ; v1(28.5,14) C26.1@28.5,14.95 ; v1(29.75,14) C27.1@29.75,14.95 ; v1(48.8,19.1) 49.475,19.1 50,18.575 C32.1@50.25,18.575 50.287,18.538 51.663,18.538 R61.1@51.7,18.5 ; v1(49.8,21.2) C16.1@50.75,21.2 ; v1(51.25,13) R59.2@52.2,13 ; v1(51.3,15) C18.1@52.2,15 ; v1(51.9,23.2) 51.95,23.2 52.7,22.45 C13.1@52.75,22.45 ; v1(54.4,91.7) 56.635,91.7 R63.1@56.685,91.75 ; C19.1@62.5,10.2 62.55,10.2 63.2,9.55 v1(63.2,9.5)
  other v1: 73.1,17.4 74.4,17.4 70.8,18.8 71.8,18.8 58.2,19.5 60.5,20.3 62.7,20.3 59.2,20.7 56.1,21.9 27,52.2 30.2,52.2 40.6,62.9 63.55,63.4 43.45,63.6 60.4,64.3 30.1,65 31.3,65.3 65.5,71.5 39.6,73 65.5,78 40.1,81.6 89,83.5 85.818,84.818 92.182,84.818 65.5,86.7 84.5,88 93.5,88 61.8,88.4 85.818,91.182 92.182,91.182 89,92.5
VC0: C16.2 R39.2 R42.2 TP35.1 U1.16 | length 46.9
  L1 - Primary w0.203: R39.2@17.5,33.95 R42.2@19,33.95 19.281,33.669 19.931,33.669 20.25,33.35 TP35.1@20.25,32.5 22.2,32.5 24,30.7 30.4,30.7 32.2,28.9 41,28.9 41.5,28.4 44.1,28.4 44.5,28 48.1,28 48.9,27.2 48.9,23.8 49.9,22.8 C16.2@50.75,22.8 ; C16.2@50.8,22.8 53.3,20.3 53.3,19.9 54.022,19.178 U1.16@55.593,19.178
VC1: C10.1 C13.2 R30.2 R33.2 TP29.1 U1.15 | length 44.9
  L1 - Primary w0.203: R30.2@21.5,33.95 R33.2@23,33.95 23.281,33.669 23.931,33.669 24.25,33.35 TP29.1@24.25,32.5 25.3,32.5 26.4,31.4 30.7,31.4 32.6,29.5 41.3,29.5 41.8,29 44.4,29 44.8,28.6 48.4,28.6 49.5,27.5 49.5,25.4 50.7,24.2 C10.1@50.75,24.2 50.825,24.125 52.675,24.125 C13.2@52.75,24.05 ; C13.2@52.8,24.05 53.8,23.05 53.8,20.1 54.222,19.678 U1.15@55.593,19.678
  L1 - Primary w0.254: R30.2@21.5,33.95 R33.2@23,33.95
VC2: C7.1 C10.2 R21.2 R24.2 TP21.1 U1.14 | length 39.1
  L1 - Primary w0.203: R21.2@25.5,33.95 R24.2@27,33.95 27.281,33.669 27.931,33.669 28.25,33.35 TP21.1@28.25,32.5 30.5,32.5 32.9,30.1 41.6,30.1 42.1,29.6 44.7,29.6 45.1,29.2 48.8,29.2 50.75,27.25 C10.2@50.75,25.8 ; C10.2@50.785,25.765 51.436,25.765 51.751,25.45 C7.1@52.75,25.45 ; C7.1@52.8,25.45 54.4,23.85 54.4,20.4 54.622,20.178 U1.14@55.593,20.178
VC3: C4.1 C7.2 R12.2 R15.2 TP15.1 U1.13 | length 36.7
  L1 - Primary w0.203: R12.2@29.5,33.95 R15.2@31,33.95 31.281,33.669 31.931,33.669 32.25,33.35 TP15.1@32.25,32.5 34.4,32.5 36.2,30.7 41.9,30.7 42.4,30.2 45,30.2 45.4,29.8 49.95,29.8 52.7,27.05 C7.2@52.75,27.05 52.7,27.1 52.7,28.3 52.9,28.5 C4.1@53.95,28.5 ; C7.2@52.8,27.05 55.593,24.257 U1.13@55.593,20.678
VC4: C2.1 C4.2 R6.2 R8.2 TP9.1 U1.12 | length 32.5
  L1 - Primary w0.203: R6.2@33.5,33.95 R8.2@35,33.95 35.281,33.669 35.931,33.669 36.25,33.35 TP9.1@36.25,32.5 37.35,31.4 42.3,31.4 42.8,30.9 45.3,30.9 45.7,30.5 50.4,30.5 50.9,30 53.8,30 54.3,29.5 55.3,29.5 55.55,29.25 C4.2@55.55,28.5 55.4,28.35 55.4,27.2 C2.1@55.2,27 55.2,26 57.093,24.107 U1.12@57.093,22.178
VC5: C2.2 C17.1 R2.2 R55.2 TP52.1 U1.11 | length 29.7
  L1 - Primary w0.203: R55.2@37.5,33.95 R2.2@39,33.95 39.281,33.669 39.931,33.669 40.25,33.35 TP52.1@40.25,32.5 42.5,32.5 43.5,31.5 45.5,31.5 46,31 50.6,31 51.1,30.5 54,30.5 54.5,30 56.7,30 56.95,29.75 C17.1@56.95,28.5 56.875,28.425 56.875,27.075 C2.2@56.8,27 56.8,25.9 57.593,25.107 U1.11@57.593,22.178
VC6: C15.1 C17.2 R48.2 R49.2 TP37.1 U1.10 | length 27
  L1 - Primary w0.203: R48.2@41.5,33.95 R49.2@43,33.95 43.281,33.669 43.931,33.669 44.25,33.35 TP37.1@44.25,32.5 46.5,32.5 47.5,31.5 50.9,31.5 51.4,31 54.2,31 54.7,30.5 57.7,30.5 58.55,29.65 C17.2@58.55,28.5 58.4,28.35 58.4,27.2 C15.1@58.2,27 58.2,25.6 58.093,25.493 U1.10@58.093,22.178
VC7: C12.1 C15.2 R38.2 R41.2 TP33.1 U1.9 | length 24.6
  L1 - Primary w0.203: R38.2@45.5,33.95 R41.2@47,33.95 47.281,33.669 47.931,33.669 48.25,33.35 TP33.1@48.25,32.5 50.8,32.5 51.7,31.6 54.4,31.6 55,31 58.3,31 59.95,29.35 C12.1@59.95,28.5 59.875,28.425 59.875,27.075 C15.2@59.8,27 59.8,26.1 58.593,24.893 U1.9@58.593,22.178
VC8: C9.1 C12.2 R29.2 R32.2 TP27.1 U1.8 | length 23.1
  L1 - Primary w0.203: R29.2@49.5,33.95 R32.2@51,33.95 51.281,33.669 51.931,33.669 52.25,33.35 TP27.1@52.25,32.5 54.5,32.5 55.5,31.5 58.6,31.5 59.4,30.7 60.9,30.7 61.55,30.05 C12.2@61.55,28.5 61.4,28.35 61.4,27.2 C9.1@61.2,27 60.9,26.7 60.9,26.4 59.093,24.593 U1.8@59.093,22.178
VC9: C6.1 C9.2 R20.2 R23.2 TP19.1 U1.7 | length 21
  L1 - Primary w0.203: R20.2@53.5,33.95 R23.2@55,33.95 55.281,33.669 55.931,33.669 56.25,33.35 TP19.1@56.25,32.5 58.7,32.5 59.8,31.4 61.4,31.4 62.95,29.85 C6.1@62.95,28.5 62.875,28.425 62.875,27.075 C9.2@62.8,27 62.8,26.95 61.95,26.1 61.4,26.1 59.593,24.293 U1.7@59.593,22.178
VC10: C3.1 C6.2 R11.2 R14.2 TP13.1 U1.6 | length 19.6
  L1 - Primary w0.203: R11.2@57.5,33.95 R14.2@59,33.95 59.281,33.669 59.931,33.669 60.25,33.35 TP13.1@60.25,32.5 62.2,32.5 64.55,30.15 C6.2@64.55,28.5 64.4,28.35 64.4,27.2 C3.1@64.2,27 64.2,26.95 62.85,25.6 61.7,25.6 60.093,23.993 U1.6@60.093,22.178
VC11: C1.1 C3.2 R5.2 R7.2 TP7.1 U1.5 | length 18.7
  L1 - Primary w0.203: U1.5@60.593,22.178 60.593,23.793 61.9,25.1 63.5,25.1 64.5,26.1 65.6,26.1 65.8,26.3 C3.2@65.8,27 65.875,27.075 65.875,28.425 C1.1@65.95,28.5 65.95,30.8 TP7.1@64.25,32.5 64.25,33.35 63.931,33.669 63.281,33.669 R7.2@63,33.95 R5.2@61.5,33.95
VC12: C1.2 C14.1 R1.2 R45.2 TP5.1 U1.4 | length 19.2
  L1 - Primary w0.203: U1.4@61.093,22.178 61.093,23.493 62.2,24.6 63.7,24.6 64.7,25.6 66.7,25.6 67.2,26.1 C14.1@67.2,27 67.4,27.2 67.4,28.35 C1.2@67.55,28.5 67.55,30.05 68.25,30.75 TP5.1@68.25,32.5 68.25,33.35 67.931,33.669 67.281,33.669 R1.2@67,33.95 R45.2@65.5,33.95
VC13: C11.1 C14.2 R37.2 R40.2 TP31.1 U1.3 | length 21.6
  L1 - Primary w0.203: U1.3@61.593,22.178 61.593,23.293 62.4,24.1 64,24.1 65,25.1 68.1,25.1 68.8,25.8 C14.2@68.8,27 68.875,27.075 68.875,28.425 C11.1@68.95,28.5 69.1,28.65 69.1,31.1 69.5,31.5 R37.2@69.5,33.95 R40.2@71,33.95 71.281,33.669 71.931,33.669 72.25,33.35 TP31.1@72.25,32.5
VC14: C8.1 C11.2 R28.2 R31.2 TP25.1 U1.2 | length 22.5
  L1 - Primary w0.203: U1.2@62.093,22.178 62.093,22.993 62.6,23.5 64.2,23.5 65.3,24.6 69.5,24.6 70.2,25.3 C8.1@70.2,27 70.4,27.2 70.4,28.35 C11.2@70.55,28.5 70.545,28.505 70.545,29.955 TP25.1@70.5,30 70.5,30.9 71.1,31.5 73,31.5 73.5,32 R28.2@73.5,33.95 R31.2@75,33.95
VC15: C5.1 C8.2 R19.2 R22.2 TP17.1 U1.1 | length 23.6
  L1 - Primary w0.203: U1.1@62.593,22.178 63.978,22.178 65.8,24 70.7,24 71.8,25.1 C8.2@71.8,27 71.875,27.075 71.875,28.425 C5.1@71.95,28.5 71.955,28.505 71.955,29.955 TP17.1@72,30 73.5,30 76.5,33 R19.2@76.5,33.95 R22.2@78,33.95
VC16: C5.2 R13.2 TP11.1 U1.48 | length 26.2
  L1 - Primary w0.203: U1.48@64.093,20.678 65.078,20.678 65.9,21.5 65.9,23 66.3,23.4 71.6,23.4 73.55,25.35 C5.2@73.55,28.5 74.9,28.5 79.5,33.1 R13.2@79.5,33.95 79.848,33.602 79.898,33.602 TP11.1@81,32.5
VPACK+: C34.2 D20.1 D24.1 MH7.0 Q20.1 Q20.2 Q20.3 Q23.1 Q23.2 Q23.3 Q26.1 Q26.2 Q26.3 Q27.2 R56.2 R60.2 R70.2 R71.2 R98.2 R101.2 TP61.1
  other v1: 11,67.5 7.818,68.818 14.182,68.818 6.5,72 15.5,72 7.818,75.182 14.182,75.182 11,76.5
VPACK-: C32.2 J9.3 J9.4 MH8.0 R62.1 R63.2 TP63.1 | length 83.4
  L1 - Primary w0.3: v1(48.3,17.7) 49.075,16.925 C32.2@50.25,16.925 50.288,16.963 51.663,16.963 R62.1@51.7,17 ; R63.2@50.815,91.75 50.865,91.7 v1(52.8,91.7)
  L3 - GND w0.3: v1(48.3,17.7) 47,19 47,39 46.1,39.9 46.1,53 48.75,55.65 48.75,87.65 v1(52.8,91.7)
  other v1: 11,83.5 7.818,84.818 14.182,84.818 6.5,88 15.5,88 7.818,91.182 14.182,91.182 11,92.5
VPCHG: Q21.2 R72.2 R73.2
VPDSG: Q18.2 R56.1 R60.1
pads on no net: J1. J1.1 J1.2 J1.9 J1.11 J1.13 J1.14 J2.4 J3.MH1 J3.MH2 J8.2 J8.3 J8.6 J9.MH1 J9.MH2 MH1.0 MH2.0 MH3.0 MH4.0 U1.19 U1.34 U1.38 U1.44 U2.15 U2.18 U2.21 U2.22 U2.27
copper on no net:
  other v1: 4.5,2 95.5,2 2.732,2.732 6.268,2.732 93.732,2.732 97.268,2.732 2,4.5 7,4.5 93,4.5 98,4.5 2.732,6.268 6.268,6.268 93.732,6.268 97.268,6.268 4.5,7 95.5,7 4.5,55.5 95.5,55.5 2.732,56.232 6.268,56.232 93.732,56.232 97.268,56.232 2,58 7,58 93,58 98,58 2.732,59.768 6.268,59.768 93.732,59.768 97.268,59.768 4.5,60.5 95.5,60.5

## Polygon pours and split planes (outlines as drawn)
VBAT+ on L1 - Primary "NONET_L03_P-001" (solid, pour order 5): 74.75,62.5 74,63.25 74,71.5 74.25,71.75 77.75,71.75 80.5,74.5 80.5,81.5 78.25,83.75 59,83.75 59,79 64.25,79 64.25,77.25 59,77.25 59,72.5 64.25,72.5 64.25,70.75 59,70.75 59,63.75 66,63.75 66.25,63.5 66.25,59.75 74.75,59.75
V_CHG_DSG on L1 - Primary "NONET_L03_P-001" (solid, pour order 6): 56.75,61.75 56.75,63.5 58.5,63.5 58.5,85.25 45.25,85.25 45.25,65.75 50.5,65.75 50.5,61.5 49.5,61.5 49.5,59.5 52,59.5 52,58.25 53.75,56.5 53.75,55 57.75,55 57.75,57.25 54.5,57.25 54,57.75 54,61.75
VPCHG on L1 - Primary "NONET_L03_P-001" (solid, pour order 8): 66,55 66.75,55.75 74.75,55.75 74.75,59.25 66,59.25 66,61.5 59,61.5 59,55
VPACK- on L1 - Primary "NONET_L03_P-001" (solid, pour order 11): 52.25,88 52.25,99 3.25,99 1.25,97 1.25,80.25 17.5,80.25 21.5,84.25 33,84.25 36.75,88
VBAT- on L1 - Primary "NONET_L03_P-001" (solid, pour order 10): 98.75,80.75 83,80.75 79.5,84.25 73,84.25 69.25,88 55,88 55,99 98,99 98.75,98.25
VPACK+ on L1 - Primary "NONET_L03_P-001" (solid, pour order 9): 43,68.25 42.25,67.5 21,67.5 16.75,63.25 1.25,63.25 1.25,79.5 18,79.5 21.75,83.25 33.75,83.25 35.75,85.25 44.75,85.25 44.75,81.25 39.75,81.25 39.75,79.75 44.75,79.75 44.75,74.75 39.75,74.75 39.75,73.25 44.75,73.25 44.75,68.25
VPDSG on L1 - Primary "NONET_L03_P-001" (solid, pour order 7): 48.25,54.75 48.25,61.5 41,61.5 40.5,62 37,62 37,54 40.5,54 41.25,54.75
VBAT+_F on L1 - Primary "NONET_L03_P-001" (solid, pour order 4): 81.25,74.75 81.25,79.75 86.25,79.75 98.75,79.75 98.75,63 74.5,63 74.5,71.25 77.75,71.25
VBAT+ on L4 - Secondary "NONET_L03_P-001" (solid, pour order 14): 80.5,81.5 78.25,83.75 59,83.75 59,65.5 61.5,63 74,63 74,71.25 80.5,77.75
VBAT+_F on L4 - Secondary "NONET_L03_P-001" (solid, pour order 13): 81.25,79.75 98.75,79.75 98.75,63 74.5,63 74.5,71.25 81.25,78
V_CHG_DSG on L4 - Secondary "NONET_L03_P-001" (solid, pour order 12): 45.25,65.75 45.25,85.25 58.5,85.25 58.5,65.75
VBAT- on L2 - GND "VBAT-_L02_P002" (solid, pour order 2): 0,2.5 0,107.5 cw(c2.5,107.5) 2.5,110 97.5,110 cw(c97.5,107.5) 100,107.5 100,2.5 cw(c97.5,2.5) 97.5,0 2.5,0 cw(c2.5,2.5)
VBAT- on L3 - GND "VBAT-_L03_P003" (solid, pour order 3): 0,2.5 0,107.5 cw(c2.5,107.5) 2.5,110 97.5,110 cw(c97.5,107.5) 100,107.5 100,2.5 cw(c97.5,2.5) 97.5,0 2.5,0 cw(c2.5,2.5)

## Silkscreen, mask and mechanical layers (free items; w line width, h text height)
Bottom Overlay:
  drawing of 10 lines, arcs and shapes, not listed
  text "WARNING: DO NOT OPERATE WHILE SUBMERGED IN WATER" at 78.371,31.292 h2
  text "E-SCOOTER / BATTERY MANAGEMENT SYSTEM / FARRIS MATAR - OCT 2023" at 37.922,1.999 h2
Mechanical 1:
  the board outline again, w0.254